# EAGLE board Clock (EAGLE 8.3.2)
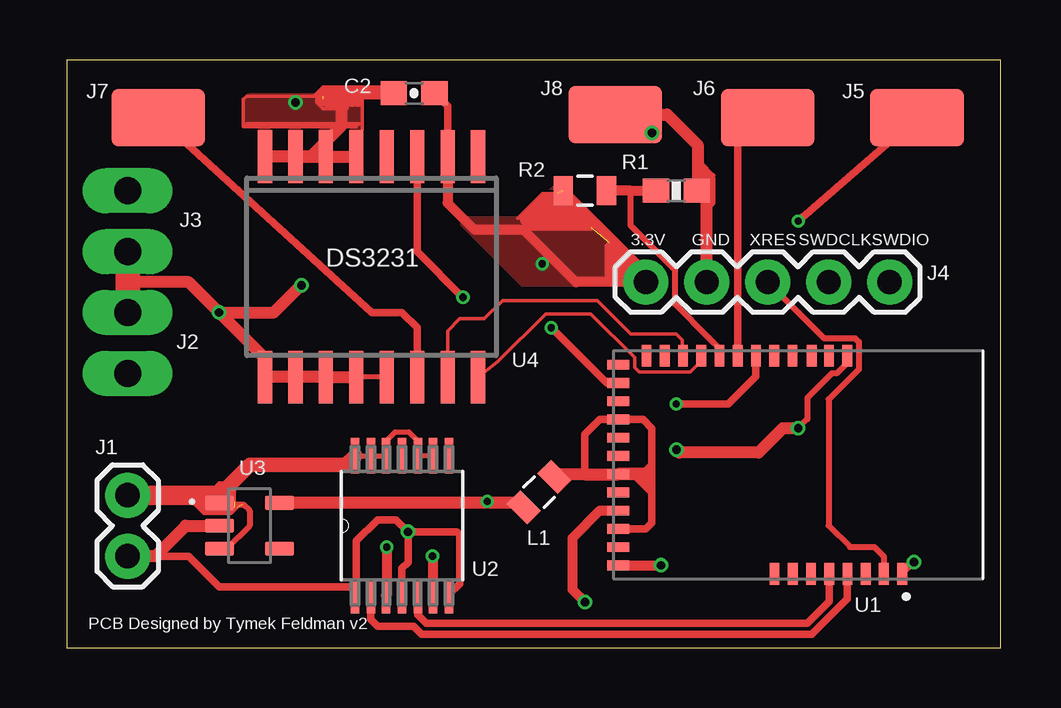
[diagram p0: board, top side]
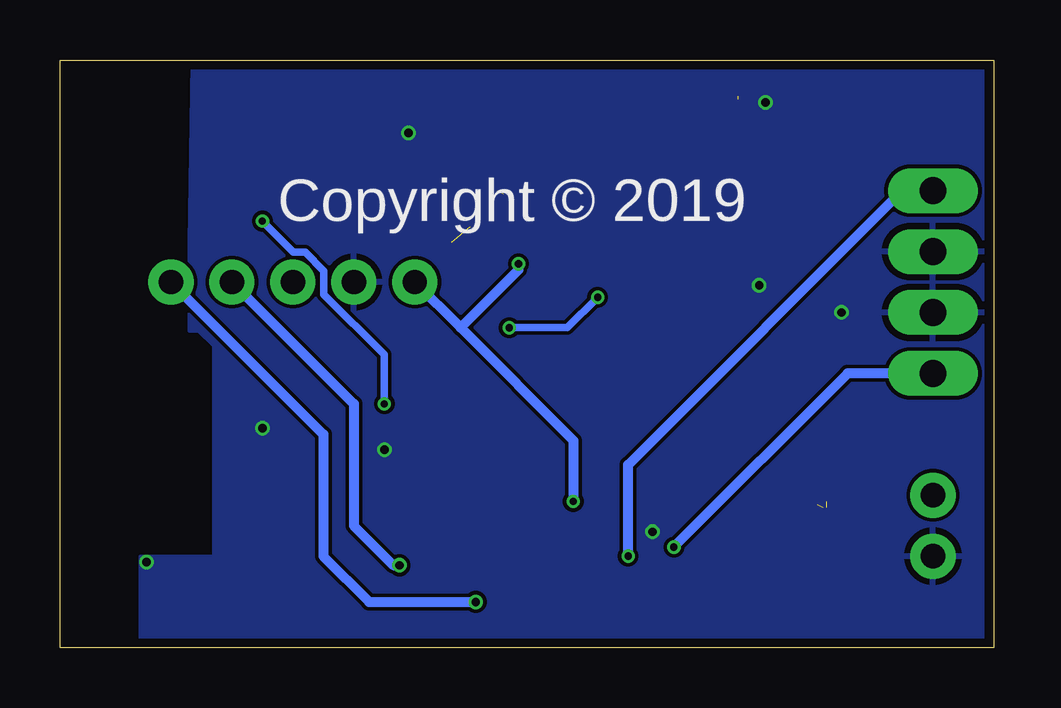
[diagram p1: board, bottom side, seen from below]

Size 38.91 x 24.5 mm. Coordinates in mm from the lower left corner, seen from the top.
Outline: 0,0 38.91,0 38.91,24.5 0,24.5 0,0
Copper layers (1*16): Top 0.035559375mm / dielectric 1.6mm / Bottom 0.035559375mm
Design rules "oshpark-2layer": minimum track width 6mil, minimum drill 10mil, track to track 6mil, track to pad 6mil, pad to pad 6mil, via to via 6mil, smd to smd 6mil, copper to edge 15mil, drill to drill 6mil, minimum pad ring 5mil, minimum via ring 5mil, stop-mask expansion 2.5mil, vias tented up to drill 0mil, thermal gap 10mil

## Footprints (pad centres in the part's own frame; a part is rotated, then mirrored left to right if it is on the bottom)
0603-CAP = smd 1.1 x 1: 1 -0.85,0; 2 0.85,0
1X02 = drill 1.016 pad 1.88: 1 0,0; 2 2.54,0
1X02_LONGPADS = drill 1.118 pad 1.88 long: 1 0,0; 2 2.54,0
1X05 = drill 1.016 pad 1.88: 1 0,0; 2 2.54,0; 3 5.08,0; 4 7.62,0; 5 10.16,0
LUXEON-PAD = smd 3.9 x 2.4: P$1 0,0
0805 = smd 0.8 x 1.2: 1 -0.9,0; 2 0.9,0
0603-RES = smd 1.1 x 1: 1 -0.85,0; 2 0.85,0
CYPRESS_CYBLE-224110-00 = smd 0.91 x 0.41: 1 4.55,4.33; 2 4.55,3.57; 3 4.55,2.81; 4 4.55,2.05; 5 4.55,1.29; 6 4.55,0.53; 7 4.55,-0.23; 8 4.55,-0.99; 21 -4.55,-6.32; 22 -4.55,-5.56; 23 -4.55,-4.8; 24 -4.55,-4.04; 25 -4.55,-3.28; 26 -4.55,-2.52; 27 -4.55,-1.76; 28 -4.55,-1; 29 -4.55,-0.24; 30 -4.55,0.56; 31 -4.55,1.28; 32 -4.55,2.04 | smd 0.41 x 0.91: 9 4.19,-7.5; 10 3.43,-7.5; 11 2.67,-7.5; 12 1.91,-7.5; 13 1.15,-7.5; 14 0.39,-7.5; 15 -0.37,-7.5; 16 -1.13,-7.5; 17 -1.89,-7.5; 18 -2.65,-7.5; 19 -3.41,-7.5; 20 -4.17,-7.5
SOP65P640X120-14N = smd 1.473 x 0.356: 1 -2.921,1.956; 2 -2.921,1.295; 3 -2.921,0.66; 4 -2.921,0; 5 -2.921,-0.66; 6 -2.921,-1.295; 7 -2.921,-1.956; 8 2.921,-1.956; 9 2.921,-1.295; 10 2.921,-0.66; 11 2.921,0; 12 2.921,0.66; 13 2.921,1.295; 14 2.921,1.956
SOT95P280X145-5N = smd 1.21 x 0.59: 1 -1.255,0.95; 2 -1.255,0; 3 -1.255,-0.95; 4 1.255,-0.95; 5 1.255,0.95
SO16W = smd 0.6 x 2.2: 1 -4.445,-4.6; 2 -3.175,-4.6; 3 -1.905,-4.6; 4 -0.635,-4.6; 5 0.635,-4.6; 6 1.905,-4.6; 7 3.175,-4.6; 8 4.445,-4.6; 9 4.445,4.6; 10 3.175,4.6; 11 1.905,4.6; 12 0.635,4.6; 13 -0.635,4.6; 14 -1.905,4.6; 15 -3.175,4.6; 16 -4.445,4.6

## Placement (x,y rotation side)
C2  100nF  [0603-CAP]  14.48,23.11 180 top
J1  5V In  [1X02]  2.54,3.81 90 top
J2  LedStripHour  [1X02_LONGPADS]  2.54,13.97 270 top
J3  LedStripMinute  [1X02_LONGPADS]  2.54,16.51 90 top
J4  [1X05]  34.29,15.24 180 top
J5  PIR  [LUXEON-PAD]  35.43,22.1 180 top
J6  TX  [LUXEON-PAD]  29.21,22.1 180 top
J7  Vbat  [LUXEON-PAD]  3.81,22.1 180 top
J8  GND  [LUXEON-PAD]  22.86,22.23 180 top
L1  330Ω 100MHz  [0805]  19.68,6.48 225 top
R1  10k  [0603-RES]  25.4,19.05 180 top
R2  LDR  [0805]  21.59,19.05 180 top
U1  CYBLE-224110-00  [CYPRESS_CYBLE-224110-00]  30.48,7.62 270 top
U2  SN74AHCT125PW  [SOP65P640X120-14N]  13.97,5.08 90 top
U3  TLV73333PDBVT  [SOT95P280X145-5N]  7.62,5.08 0 top
U$1  DS3231  [SO16W]  12.7,15.88 180 top

## Library data of the parts
C2 = SparkFun-Capacitors
J1-J8 = SparkFun-Connectors
L1 = SparkFun-Passives
R1 R2 = SparkFun-Resistors
U1 = CYBLE-224110-00; AVAILABILITY: Warning; DESCRIPTION: Bluetooth Class II 1.8 to 5.5V 1000Kbps 32-Pin SMD T/R; MF: Cypress Semiconductor; MP: CYBLE-224110-00; PACKAGE: Module Cypress Semiconductor; PRICE: 16.02 USD
U2 = SN74AHCT125PW; DESCRIPTION: IC BUS BUFFER TRI-ST QD 14TSSOP; DIGI-KEY_PART_NUMBER: 296-26414-5-ND; DIGI-KEY_PURCHASE_URL: https://www.digikey.nl/product-detail/en/texas-instruments/SN74AHCT125PW/296-26414-5-ND/1567014?WT.z_cid=ref_snapeda&utm_source=snapeda&utm_medium=aggregator&utm_campaign=buynow; MF: Texas Instruments; MP: SN74AHCT125PW; PACKAGE: TSSOP-14 Texas Instruments
U3 = TLV73333PDBVT; AVAILABILITY: Good; DESCRIPTION: IC REG LINEAR 3.3V 300MA SOT23-5; MF: Texas Instruments; MP: TLV73333PDBVT; PACKAGE: SOT-23-5 Texas Instruments; PRICE: 0.24 USD
U$1 = DS3231

## Nets
3.3V: C2.1 J4.5 L1.2 R2.2 U3.5 U$1.2
5V: J1.2 U2.9 U2.10 U2.12 U2.13 U2.14 U3.1 U3.3
GND: C2.2 J1.1 J2.1 J3.1 J4.4 J8.P$1 R1.1 U1.1 U1.32 U2.1 U2.4 U2.7 U3.2 U$1.5 U$1.6 U$1.7 U$1.8 U$1.9 U$1.10 U$1.11 U$1.12 U$1.13
HOUR: U1.4 U2.2
HOURTRACE: J2.2 U2.3
LDR: R1.2 R2.1 U1.25
MINUTE: U1.5 U2.5
MINUTETRACE: J3.2 U2.6
N$4: J7.P$1 U$1.14
N$5: L1.1 U1.11 U1.14 U1.17
PIR: J5.P$1 U1.27
SCL: U1.24 U$1.16
SDA: U1.23 U$1.15
SQW: U1.19 U$1.3
SWDCLK: J4.2 U1.9
SWDIO: J4.1 U1.12
TX: J6.P$1 U1.26
VREF: U1.22
XRES: J4.3 U1.2

## Tracks (layer width: path | path; a pad name or v marks a point on that pad's centre or on a via)
3.3V  (via drill 0.3)  (2 unrouted)
  Top 0.152: 19.05,17.78 19.05,18.16 | 19.05,18.16 19.81,18.92 20.45,18.92 | 19.05,18.16 18.8,17.91 18.92,17.91 19.81,18.8 19.81,18.67 | 19.81,18.67 19.81,18.41 19.56,18.41 19.81,18.67 | 22.48,15.37 22.48,15.49 | 22.48,15.49 22.48,16.76 22.61,16.89 22.61,15.62 22.48,15.49 | 22.48,15.49 22.61,15.49 22.61,16.64 22.73,16.76 22.73,16.64 22.86,16.51
  Top 0.305: R2.2 19.05,17.41 | v17.53,6.1 18.79,6.1 L1.2 | C2.1 15.88,22.57 15.88,20.32 | 19.3,17.53 21.84,17.53 21.84,17.65 21.59,17.91 19.56,17.91 19.3,18.16 19.3,18.03 19.05,17.78
  Top 0.406: U$1.2 15.88,20.32 15.88,18.54 17.01,17.41 19.05,17.41 21.22,15.24 J4.5 24.13,15.61 R2.2
  Top 0.508: L1.2 18.86,6.03 U3.5
  Bottom 0.406: 22.23,13.34 J4.5 | 22.23,13.34 17.53,8.64 v17.53,6.1 | v19.81,16 19.81,15.75 22.23,13.34
  pour Top: 24.13,15.24 19.05,15.24 16.51,17.78 19.05,17.78 20.32,19.05
5V  (2 unrouted)
  Top 0.152: 5.84,5.59 5.71,5.59 5.08,6.22 5.21,6.22 5.84,5.59 | 5.84,5.59 6.86,5.59 7.11,5.84 6.99,5.84 6.86,5.71 | 6.99,6.1 6.99,6.6 6.86,6.6 6.6,6.86 6.35,6.86 6.22,6.73
  Top 0.203: U2.14 U2.13 U2.12 13.31,8.61 13.69,8.99 14.25,8.99 14.4,8.84 14.61,8.64 14.61,8.03 U2.10 U2.9
  Top 0.254: U3.3 6.67,4.13 7.62,5.08 7.62,5.71 7.37,5.97 6.43,5.97 U3.1
  Top 0.61: U2.14 11.63,7.62 7.62,7.62 6.35,6.35 6.04,6.35
  Top 0.813: J1.2 6.04,6.35 U3.1
GND  (via drill 0.35)  (1 unrouted)
  Top 0.152: 7.49,21.84 12.19,21.84 12.06,21.72 7.37,21.72 7.37,22.86 7.49,22.99 10.29,22.99 | 10.29,22.99 10.67,22.99 | 10.67,22.99 10.92,22.99 11.18,23.24 11.81,23.24 | 10.29,22.99 10.67,23.37 13.21,23.37 13.59,22.99 | 10.54,23.11 10.67,23.24 10.67,22.99 | 12.32,21.59 12.32,22.99 | 12.32,23.11 12.32,22.99 | 12.32,22.99 12.19,22.86 12.19,22.61 12.06,22.61 12.06,22.86 11.94,22.86 11.94,22.61 11.81,22.61 11.81,22.86 11.68,22.73 11.68,22.48 10.67,22.48 10.54,22.61 | 10.54,22.61 10.41,22.73 10.41,22.86 10.54,22.86 | 10.67,22.86 10.67,22.61 10.54,22.61 | 10.54,22.61 10.54,22.86 | 10.54,22.86 10.67,22.86 | 10.67,22.86 10.79,22.73 | 10.79,22.73 10.79,22.61 11.18,22.61 11.18,22.73 10.79,22.73
  Top 0.203: U$1.13 U$1.11
  Top 0.254: U1.32 32.52,11.88 32.08,11.44 31.88,11.44 30.86,10.41 30.86,9.53 v30.48,9.14 | U1.1 v35.31,3.56
  Top 0.305: U2.7 15.93,2.21 16.38,2.67 16.38,4.7 16.26,4.83 v14.22,4.83 | v14.22,4.83 13.72,5.33 12.95,5.33 12.06,4.45 12.06,2.54 | 12.06,2.54 12.06,2.21 U2.1 | U2.4 13.97,3.3 14.22,3.56 v14.22,4.83 | J1.1 5.08,3.81 6.35,2.54 12.06,2.54 | J2.1 2.54,15.24 J3.1
  Top 0.508: J1.1 3.68,3.81 4.95,5.08 U3.2 | v6.35,13.97 8.26,12.06 U$1.9 U$1.10 U$1.11 U$1.12 | v6.35,13.97 5.08,15.24 2.54,15.24 | U$1.6 10.16,20.48 | U$1.6 U$1.5 | 10.16,20.48 U$1.8 | C2.2 12.32,23.11 11.68,23.11 11.43,22.86 11.43,21.75 10.16,20.48 | v6.35,13.97 8.64,13.97 v9.78,15.11 | J8.P$1 25.02,22.23 26.29,20.95 26.29,19.09 R1.1 26.67,18.63 J4.4 | U$1.7 U$1.6 | v30.48,9.14 29.84,9.14 28.83,8.13 25.53,8.13 v25.4,8.26
  Top 1.016: J3.1 J2.1
  other vias: 9.53,22.73 24.38,21.46
  pour Bottom: 0,24.51 0,0 35.56,0 35.56,3.81 32.51,3.81 32.51,12.57 33.15,13.21 33.53,13.21 33.53,16.89 33.4,24.38
  pour Top: 11.43,22.86 7.62,22.86 7.62,21.59 12.06,21.59 12.06,22.99 11.43,22.99
HOUR
  Top 0.305: U2.2 12.68,1.17 12.95,0.89 14.47,0.89 14.8,0.56 31.05,0.56 32.53,2.04 U1.4
HOURTRACE  (via drill 0.3)
  Top 0.406: v13.34,4.19 13.34,2.18 U2.3
  Bottom 0.406: J2.2 6.1,11.43 v13.34,4.19
LDR
  Top 0.254: 23.5,19.05 23.5,17.6 25.35,15.74 25.35,14.32 26.75,12.91 | 26.75,12.91 26.92,12.74 | U1.25 27.2,12.46 26.75,12.91
  Top 0.406: R2.1 23.5,19.05 R1.2
MINUTE
  Top 0.305: U2.5 14.63,1.37 14.99,1.02 30.86,1.02 31.77,1.93 U1.5
MINUTETRACE  (via drill 0.3)
  Top 0.406: U2.6 15.27,3.79 v15.24,3.81
  Bottom 0.406: v15.24,3.81 15.24,7.62 3.81,19.05 J3.2
N$1
  Top 0.203: 26.8,18.67 26.8,19.43 26.42,19.81
N$2
  Top 0.203: 26.42,19.94 26.54,19.94 26.92,19.56 | 26.92,19.56 26.92,18.54 26.8,18.41 | 26.92,19.56 26.92,19.68 26.42,20.19
N$4
  Top 0.305: J7.P$1 12.7,13.97 13.97,13.97 14.61,13.34 U$1.14
N$5
  Top 0.305: U1.11 24.13,4.95 24.38,5.21 24.38,6.48 | 24.38,6.48 23.63,7.23 U1.14 | 24.38,7.62 24.38,9.14 24.02,9.51 U1.17 22.21,9.51 21.59,8.89 21.59,7.23 | 24.38,7.62 24.26,7.49 | 24.26,7.49 23.99,7.23 U1.14 | 24.38,7.24 24.38,6.86 | 24.38,7.24 24.38,7.62 | 24.38,6.86 24.38,6.48 | U1.14 24.01,7.23 24.38,6.86 | 24.26,7.49 24.26,7.37 24.38,7.24
  Top 0.508: L1.1 20.44,7.23 21.59,7.23 U1.14
PIR  (via drill 0.3)
  Top 0.305: J5.P$1 v30.48,17.78 | v25.4,10.16 27.56,10.16 28.7,11.3 28.7,12.15 U1.27
  Bottom 0.305: v30.48,17.78 29.18,16.48 28.69,16.48 27.91,15.71 27.91,14.72 25.4,12.21 v25.4,10.16
S$1
  Top 0.152: 11.05,22.99 11.18,23.11
SCL
  Top 0.152: U$1.16 17.95,11.91 19.95,13.92 21.84,13.92 23.66,12.09 23.66,11.68 23.86,11.49 25.98,11.49 26.44,11.95 U1.24
SDA
  Top 0.152: U1.23 25.65,12.2 25.65,12.83 25.4,13.08 23.5,13.08 22.1,14.48 18.16,14.48 17.4,13.72 16.38,13.72 15.88,13.21 U$1.15
SQW  (via drill 0.3)
  Top 0.305: U$1.3 14.61,16.51 v16.51,14.61 | v20.19,13.34 22.5,11.03 U1.19
  Bottom 0.305: v16.51,14.61 17.78,13.34 v20.19,13.34
SWDCLK  (via drill 0.35)
  Top 0.406: U1.9 v24.77,3.43
  Bottom 0.406: J4.2 26.67,10.16 26.67,5.08 25.02,3.43 v24.77,3.43
SWDIO  (via drill 0.35)
  Top 0.406: v21.59,1.91 21.08,2.41 21.08,4.57 22.22,5.71 U1.12
  Bottom 0.406: J4.1 27.94,8.89 27.94,3.81 26.04,1.91 v21.59,1.91
TX
  Top 0.305: J6.P$1 27.96,21.61 U1.26
XRES
  Top 0.254: J4.3 31.55,12.9 32.84,12.9 33,12.74 33,11.6 31.75,10.35 31.75,5.08 32.64,4.19 33.66,4.19 34.05,3.8 U1.2
(copper drawn outside any net)
  shapes: Top area x18

## Text on the board
tPlace: 3.3V | GND | XRES | SWDCLK | SWDIO | DS3231
tNames: J3 | J2 | U4 | PCB Designed by Tymek Feldman v2
bNames: Copyright © 2019